# Altium PCB SatelliteDevBoard.PcbDoc
Units mil, origin at the board's own origin, x right, y up, seen from the top; angles counter-clockwise.
Board outline 4550 x 2700 mil, 2 copper layers (Top, Bottom); 16 components, 22 nets, 90 pads, 0 vias.
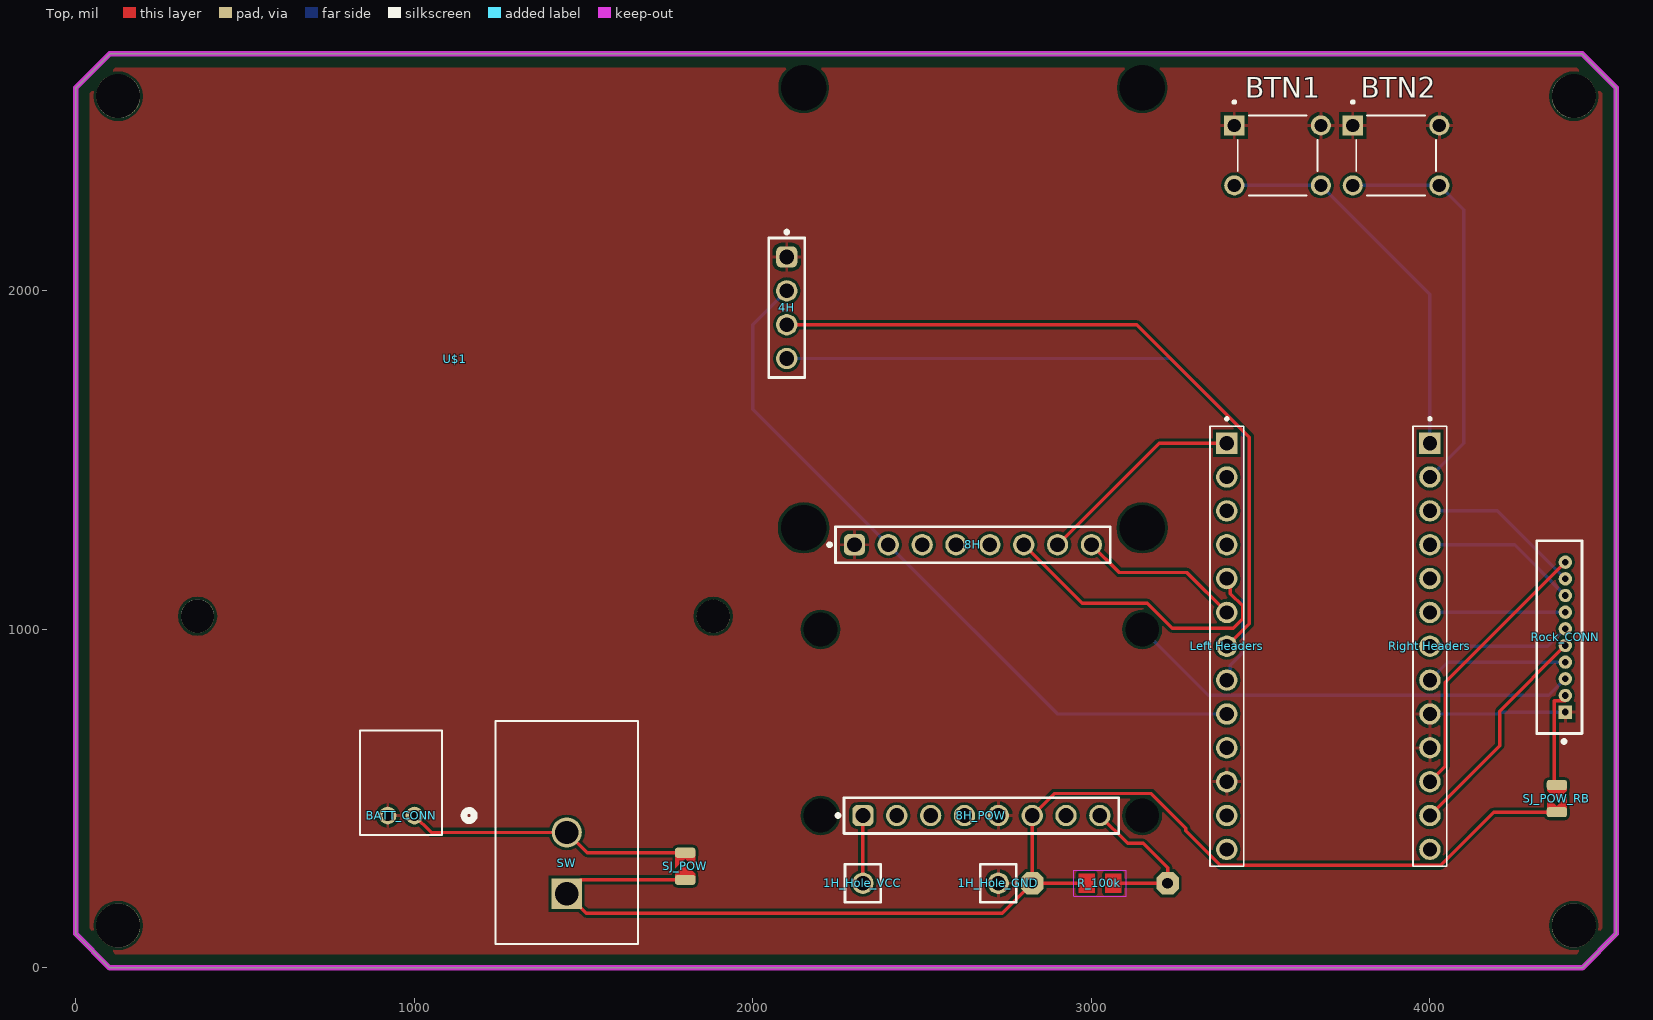
[diagram p0: Top view]
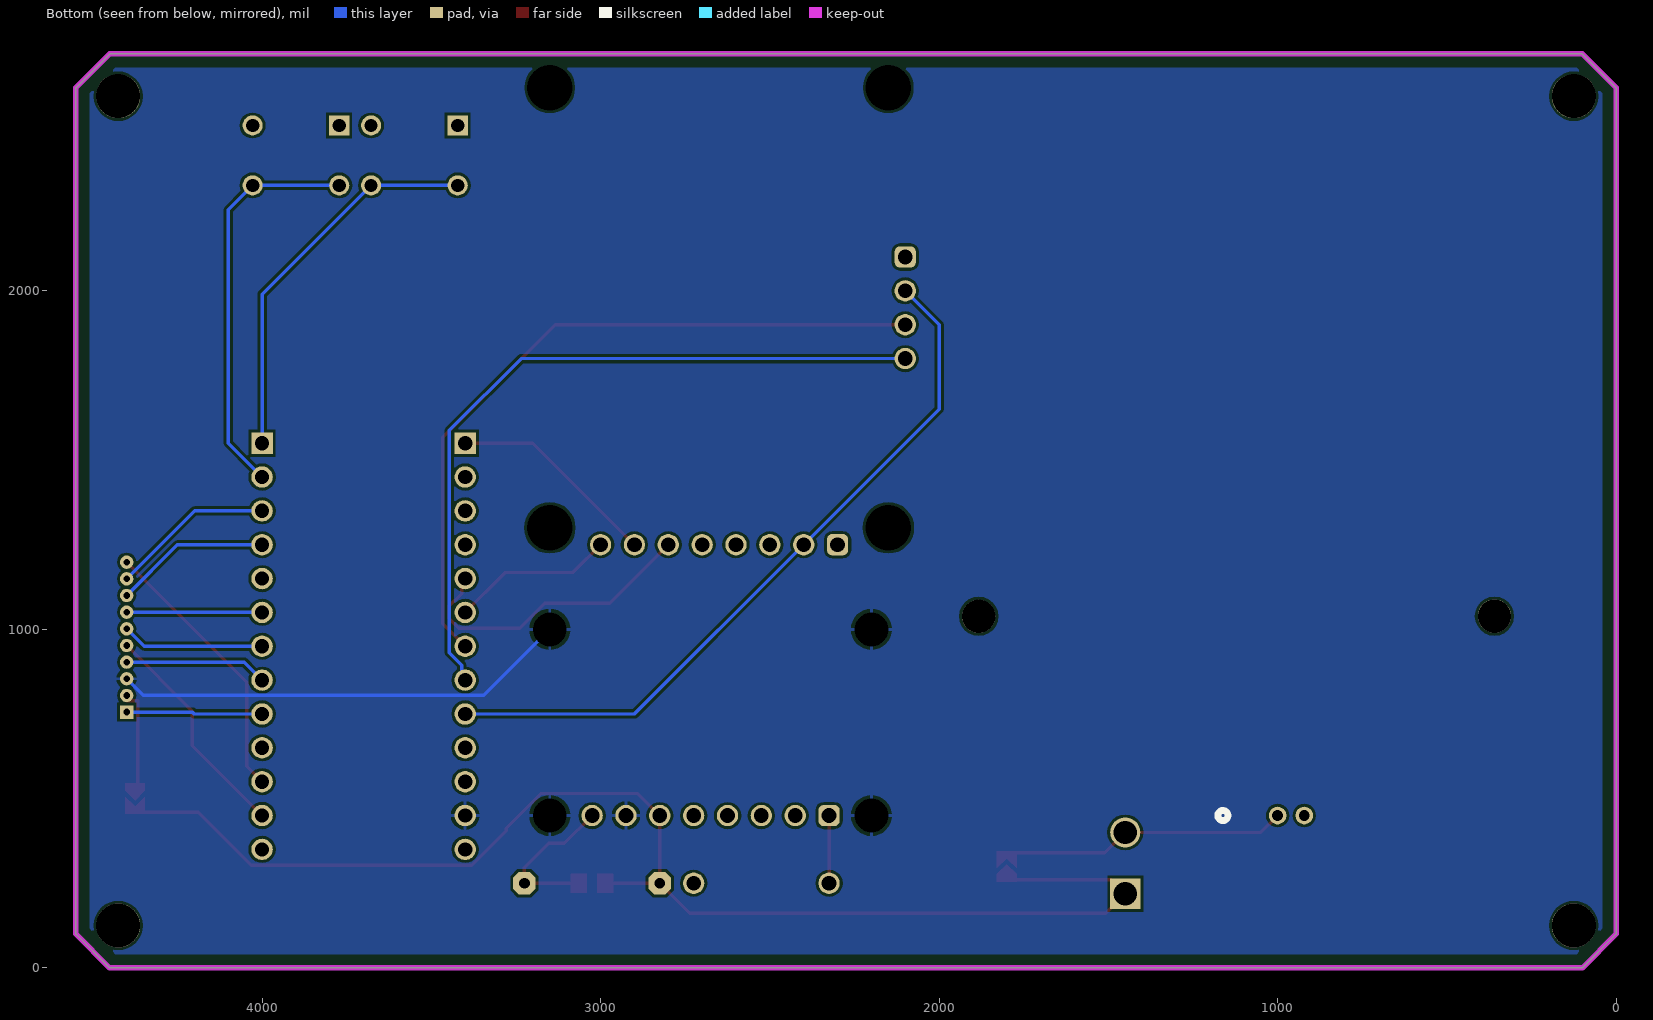
[diagram p1: Bottom view, seen from below]

## Layer stack, top to bottom
Top Solder: solder mask 0.4, Solder Resist, Dk 3.5
Top: signal copper 1.378
Dielectric 1: dielectric 12.6, FR-4, Dk 4.8
Bottom: signal copper 1.378
Bottom Solder: solder mask 0.4, Solder Resist, Dk 3.5

## Board outline
4550,2600 4450,2700 100,2700 0,2600 0,100 100,0 4450,0 4550,100

## Design rules (kind name [scope] priority, off if disabled: settings)
BoardOutlineClearance mdCopperDimension [All] p1: gap=10 ignorepadtopadclearanceinfootprint=FALSE except(0: Arc-SplitContinuation Track-SplitContinuation SMDPad-SplitContinuation THPad-SplitContinuation Via-SplitContinuation Fill-SplitContinuation Poly-SplitContinuation Region-SplitContinuation Text-SplitContinuation; 40: Poly-OutlineEdge Poly-CavityEdge Poly-CutoutEdge Poly-SplitBarrior)
Clearance "Clearance (Same Net)" [All] p1: gap=8 ignorepadtopadclearanceinfootprint=FALSE
Clearance [All] p2: gap=8 ignorepadtopadclearanceinfootprint=FALSE
Clearance Clearance_2 [(InNet('+3V3') OR InNet('+3V3') OR InNet('+3V3') OR InNet('+3V3'))] p3: gap=10 ignorepadtopadclearanceinfootprint=FALSE
Clearance Clearance_1 [All] p4: gap=10 ignorepadtopadclearanceinfootprint=FALSE
HoleSize [All] p1: absolutevalues=TRUE maxlimit=100000 minlimit=20 maxpercent=80.000 minpercent=20.000
HoleToHoleClearance mdDrill [All] p1: gap=8 allowstackedmicrovias=TRUE
MinimumSolderMaskSliver [All] p1 off: minsoldermaskwidth=10
PasteMaskExpansion mlMinCreamFrame [All] p1: expansion=0
PolygonConnect PolygonConnect_For_PolygonThermal_ON_Width160000_Gap100000 [InPolygonClass('PolygonThermal_ON_Width160000_Gap100000') vs Not IsVia] p1: connectstyle=Relief reliefconductorwidth=16 reliefentries=4 polygonreliefangle="90 Angle" airgapwidth=10
PolygonConnect ThermalVias [IsVia] p2: connectstyle=Direct reliefconductorwidth=10 reliefentries=4 polygonreliefangle="90 Angle" airgapwidth=10
PolygonConnect [All] p3: connectstyle=Relief reliefconductorwidth=10 reliefentries=4 polygonreliefangle="90 Angle" airgapwidth=10
RoutingVias [All] p1: holewidth=20 width=36 viastyle="Through Hole" minholewidth=20 minwidth=36 maxholewidth=100 maxwidth=100
SolderMaskExpansion mlMinStopFrame [All] p1: expansion=4 istentingtop=FALSE
SupplyNets "Schematic Supply Nets_2" [InNet('+3V3')] p1: voltage=0.000
SupplyNets "Schematic Supply Nets_1" [InNet('VCC')] p2: voltage=0.000
SupplyNets "Schematic Supply Nets" [InNet('GND')] p3: voltage=0.000
Width [All] p1: maxlimit=10 minlimit=10 preferedwidth=10
26 further rules are at their usual default settings.

## Components (designator, comment, footprint, x,y, rotation, side; value= is the part's Value field where it differs from the comment)
1H_Hole_GND "Solar_Hole" 61300111121 2725,250 r90 top
1H_Hole_VCC "Solar_Hole" 61300111121 2325,250 r90 top
4H "GNS_4Header" 61300411121 2100,1950 r270 top
8H "GNS_8Header" 61300811121 2650,1250 r0 top
8H_POW "Converter" 61300811121 2675,450 r0 top
BATT_CONN "Battery_Connector" CONN_S2B-PH-K-S_JST 1000,450 r180 top
BTN1 "ALERT_BTN" SW_TS02-66-43-BK-260-LCR-D 3550,2400 r0 top
BTN2 "SOS_BTN" SW_TS02-66-43-BK-260-LCR-D 3900,2400 r0 top
"Left Headers" "KB2040_Left_Header" HARWIN_M20-9991346 3400,950 r270 top
R_100k "" 0805-THM 3025,250 r180 top
"Right Headers" "KB2040_Right_Header" HARWIN_M20-9991346 4000,950 r270 top
Rock_CONN "53047-1010" FP-53047-1010-MFG 4382.28,976.97 r270 top
SJ_POW "Solder Jumper" SOLDERJUMPER_ARROW_NOPASTE 1800,300 r90 top
SJ_POW_RB "Solder Jumper for RockBLOCK" SOLDERJUMPER_ARROW_NOPASTE 4375,500 r270 top
SW "BATT_SW" SW2_GF-123-0054_CWI 1450,219 r180 top
U$1 "ROCKBLOCK-9603" ROCKBLOCK-9603 1121.26,1800 r90 top

## Footprints (in the part's own frame and the unit in brackets; to place one, negate y for a bottom-side part, rotate by r counter-clockwise, add the part's x,y. Pads: shape width x height; smd on the part's side, far side on the other; paste and mask are expansions set on the pad)
0805-THM [mil]
  oct 66x66 / inner round 60.98 / far side oct 66x66 hole 32: 1(-200,0) 2(200,0)
  Top region: 15.75,-27.56 15.75,27.56 62.99,27.56 62.99,-27.56
  Top region: -62.99,-27.56 -62.99,27.56 -15.75,27.56 -15.75,-27.56
  Top lines w10: 200.79,0 200,0 39.37,0 ; -43.31,0 -177.17,0
  Top keep-out lines w2: 77.68,38.7 77.68,-38.7 -77.68,-38.7 -77.68,38.7 77.68,38.7
61300111121 [mm] "Pin Header, pitch 2.54 mm, THT, Vertical, single row, 1p"
  round 1.6 hole 1.1: 1(0,0)
  silkscreen extent -1.42,-1.34 1.42,1.34, body extent -1.27,-1.27 1.27,1.27, height 8.57
61300411121 [mm] "Pin Header, pitch 2.54 mm, THT, Vertical, single row, 4p"
  rrect50% 1.6x1.6 hole 1.1: 1(-3.81,0)
  round 1.6 hole 1.1: 2(-1.27,0) 3(1.27,0) 4(3.81,0)
  silkscreen extent -5.8,-1.34 5.23,1.34, body extent -5.08,-1.27 5.08,1.27, height 8.57
61300811121 [mm] "Pin Header, pitch 2.54 mm, THT, Vertical, single row, 8p"
  rrect50% 1.6x1.6 hole 1.1: 1(-8.89,0)
  round 1.6 hole 1.1: 2(-6.35,0) 3(-3.81,0) 4(-1.27,0) 5(1.27,0) 6(3.81,0) 7(6.35,0) 8(8.89,0)
  silkscreen extent -10.88,-1.34 10.31,1.34, body extent -10.16,-1.27 10.16,1.27, height 8.57
CONN_S2B-PH-K-S_JST [mil]
  round 52 / inner round 60 / far side round 52 hole 32 paste-99999 mask+0: 1(0,0) 2(78.74,0)
  silkscreen extent -177,-251 160,58
FP-53047-1010-MFG [mm]
  rect 1x1 hole 0.508 paste-2539.97 mask+0: 1(5.625,0.45)
  round 1 hole 0.508 paste-2539.97 mask+0: 2(4.375,0.45) 3(3.125,0.45) 4(1.875,0.45) 5(0.625,0.45) 6(-0.625,0.45) 7(-1.875,0.45) 8(-3.125,0.45) 9(-4.375,0.45) 10(-5.625,0.45)
  silkscreen extent -7.23,-1.7 7.95,1.7, body extent -7.32,-1.8 7.32,1.8, height 0.25
HARWIN_M20-9991346 [mm]
  rect 1.605x1.605 / inner round 1.605 / far side rect 1.605x1.605 hole 1.07: 1(-15.24,0)
  round 1.605 hole 1.07: 2(-12.7,0) 3(-10.16,0) 4(-7.62,0) 5(-5.08,0) 6(-2.54,0) 7(0,0) 8(2.54,0) 9(5.08,0) 10(7.62,0) 11(10.16,0) 12(12.7,0) 13(15.24,0)
  silkscreen extent -17.17,-1.27 16.51,1.27
ROCKBLOCK-9603 [mil] "ROCKBLOCK-9603"
SOLDERJUMPER_ARROW_NOPASTE [mil]
  rrect50% 30x60 smd paste+0 mask+0: 1(-40,0) 2(40,0)
  Top region: -45,29 -22.5,29 6.5,0 -22.5,-29 -45,-29 -45,29
  Top region: -5,29 23,0 -5,-29 45,-29 45,29 -5,29
SW2_GF-123-0054_CWI [mil]
  rect 89x89 / inner round 60 / far side rect 89x89 hole 69 paste-99999 mask+0: 1(0,0)
  round 89 / inner round 60 / far side round 89 hole 69 paste-99999 mask+0: 2(0,-181)
  silkscreen extent -210,-510 210,148
SW_TS02-66-43-BK-260-LCR-D [mm]
  rect 1.508x1.508 / inner round 1.508 / far side rect 1.508x1.508 hole 1: 1(-3.25,2.25)
  round 1.508 hole 1: 2(3.25,2.25) 3(-3.25,-2.25) 4(3.25,-2.25)
  silkscreen extent -3.35,-3 3,4.1, body extent -3.95,-3 3.95,3, height 4.3

## Part data
1H_Hole_GND 1H_Hole_VCC: library part CMP-1502-01058-4, "THT Vertical Pin Header WR-PHD, Pitch 2.54 mm, Single Row, 1 pins", Color=Black, Contact Resistance=20mΩ, Current Rating=3A, Operating Supply Voltage=250V, Connector Type="Male Pin", Contact Material=Copper, Contact Mating Length=5.9944mm, Contact Plating=Gold, Gender=Male, Lead Pitch=2.54mm, Mount="Through Hole", Number of Contacts=1, Number of Pins=1, Number of Positions=1, Number of Rows=1, Orientation=Vertical, Packaging=Bulk, RoHS=Compliant, Termination=Solder
4H: library part CMP-1502-01064-4, "THT Vertical Pin Header WR-PHD, Pitch 2.54 mm, Single Row, 4 pins", Color=Black, Contact Resistance=20mΩ, Current Rating=3A, Max Operating Temperature=105°C, Min Operating Temperature=-40°C, Operating Supply Voltage=250V, Connector Type="Male Pin", Contact Material=Gold, Contact Mating Length=5.9944mm, Contact Plating=Gold, Gender=Male, Height=8.89mm, Lead Free="Lead Free", Lead Pitch=2.54mm, Mount="Through Hole", Number of Contacts=4, Number of Pins=4, Number of Positions=4, Number of Rows=1, Orientation=Vertical, Packaging=Bulk, Pitch=2.54mm, RoHS=Compliant, Termination=Solder, Voltage Rating=250V
8H 8H_POW: library part CMP-1502-01076-4, "THT Vertical Pin Header WR-PHD, Pitch 2.54 mm, Single Row, 8 pins", Color=Black, Contact Resistance=20mΩ, Current Rating=3A, Max Operating Temperature=105°C, Min Operating Temperature=-40°C, Operating Supply Voltage=250V, Connector Type="Male Pin", Contact Material=Gold, Contact Mating Length=5.9944mm, Contact Plating=Gold, Gender=Male, Height=8.54mm, Lead Pitch=2.54mm, Mount="Through Hole", Number of Contacts=8, Number of Pins=8, Number of Positions=8, Number of Rows=1, Orientation=Vertical, Packaging=Bulk, Pitch=2.54mm, RoHS=Compliant, Termination=Solder, Voltage Rating=250V
BATT_CONN: library part S2B-PH-K-SLFSN, "CONNECTOR; MALE; THROUGH HOLE; 2.0MM PITCH; DISCONNECTABLE CRIMP STYLE CONNECTOR; SIDE ENTRY TYPE; RIGHT ANGLE; 2PINS", Manufacturer_Name=JST, Manufacturer_Part_Number=S2B-PH-K-S(LF)(SN), Copyright="Copyright (C) 2025 Ultra Librarian. All rights reserved.", RefDes=RefDes, Type=Type
BTN1 BTN2: library part TS02-66-43-BK-260-LCR-D, "6 x 6 mm, 4.3 mm Actuator Height, 260 gf, Black, Long Crimped, Through Hole, SPST, Tactile Switch", Package=None, Check_prices=https://www.snapeda.com/parts/TS02-66-43-BK-260-LCR-D/Same+Sky/view-part/?ref=eda, MF="Same Sky", MP=TS02-66-43-BK-260-LCR-D, SnapEDA_Link=https://www.snapeda.com/parts/TS02-66-43-BK-260-LCR-D/Same+Sky/view-part/?ref=snap
"Left Headers" "Right Headers": library part M20-9991346, Package=None, Availability=Unavailable, MP=M20-9991346, Price=None
R_100k: library part RESISTOR_DUAL, Package=0805-THM, DeviceSetName=RESISTOR_DUAL, GateName_1=G$1, LibraryName=microbuilder, SymbolName_1=R-US
Rock_CONN: library part CMP-04776-000170-1, "CONN HEADER VERT 10POS 1.25MM", Color=Natural, Contact Resistance=20MR, Current=1A, Flammability Rating="UL94 V-0", Housing Color=White, Insulation Resistance=100MR, Max Operating Temperature=85°C, Max Voltage Rating (AC)=125V, Max Voltage Rating (DC)=125.125kV, Min Operating Temperature=-40°C, Package Quantity=2000, Body Plating=Tin, Contact Gender=Male, Contact Material=Bronze, Contact Plating=Tin, Current Rating=1A, Depth=3.2mm, Glow Wire Compliant=Non-compliant, Height=4.2mm, Housing Material=Nylon, Lead Free="Lead Free", Lead Pitch=1.25mm, Length=14.25mm, Max Current Rating=1A, Mount="Through Hole", Number of Circuits=10, Number of Contacts=10, Number of Poles=10, Number of Positions=10, Number of Rows=1, Orientation=Vertical, Packaging=Tray, Pitch=1.25mm, Plating=Tin, Radiation Hardening=No, RoHS Compliant=Yes, Series=PicoBlade, Termination=Solder, Voltage=125V, Voltage Rating=125V, Voltage Rating (AC)=125V, Voltage Rating (DC)=125V, Working Voltage=125V
SJ_POW SJ_POW_RB: library part SOLDERJUMPER, Package=SOLDERJUMPER_ARROW_NOPASTE, BOM=EXCLUDE, DeviceSetName=SOLDERJUMPER, GateName_1=1, LibraryName=microbuilder, SymbolName_1=SOLDERJUMPER
SW: library part GF-123-0054, "Description", Manufacturer_Name="CW Industries", Copyright="Copyright (C) 2025 Ultra Librarian. All rights reserved.", Manufacturer_Part_Number=GF-123-0054
U$1: DeviceSetName=ROCKBLOCK-9603, GateName_1=G$1, LibraryName=nootropicdesign, SymbolName_1=SATMODEM

## Free pads (board coordinates)
  round 60 hole 135: 5(2150,2600) 6(3150,2600) 7(3150,1300) 8(2150,1300)
  round 60 hole 100: 9(2200,1000) 10(3150,1000) 11(3150,450) 12(2200,450)
  round 98.43 hole 98.43 unplated: MH1(359.4,1039) MH2(1883,1038.5)
  round 130 hole 130 unplated: MH3(125,125) MH4(4425,125) MH5(125,2575) MH6(4425,2575)

## Nets (pads, with @x,y where several pads share a name; then routed paths per layer and width w, separated by ;. In a path a pad name is that pad's centre, name@x,y a point inside that pad or via, vN(x,y) a via of type N, cw(c..) or ccw(c..) an arc to the next point about the centre after c; other vN are vias at no path point)
+3V3: 4H.2 8H.2 "Left Headers.9" | length 2164.2
  Bottom w10: 4H.2 2000,1900 2000,1650 8H.2 2900,750 3400,750
GND: 1H_Hole_GND.1 4H.1 8H.1 8H_POW.5 "Left Headers.11" "Right Headers.9" "Right Headers.10" BATT_CONN.2 BTN1.1 BTN1.2 BTN2.1 BTN2.2 Rock_CONN.1 | length 402.3
  Bottom w10: 4000,750 4200,750 4205.51,755.51 Rock_CONN.1
Net1H_Hole_VCC_1: 1H_Hole_VCC.1 8H_POW.1 | length 200
  Top w10: 1H_Hole_VCC.1 8H_POW.1
Net4H_3: 4H.3 "Left Headers.7" | length 2149.6
  Top w10: 4H.3 3134.4,1900 3466.59,1567.81 3466.59,1016.59 3400,950
Net4H_4: 4H.4 "Left Headers.8" | length 2191.6
  Bottom w10: 4H.4 3234.4,1800 3446.59,1587.81 3446.59,930.7 3410.18,894.28 3410.18,860.18 3400,850
Net8H_6: 8H.6 "Left Headers.5" | length 898.6
  Top w10: 8H.6 2973.3,1076.7 3165.22,1076.7 3238.52,1003.41 3419.3,1003.41 3446.59,1030.7 3446.59,1069.3 3410.18,1105.72 3410.18,1139.82 3400,1150
Net8H_7: 8H.7 "Left Headers.1" | length 624.3
  Top w10: 8H.7 3200,1550 3400,1550
Net8H_8: 8H.8 "Left Headers.6" | length 482.8
  Top w10: 8H.8 3082,1168 3282,1168 3400,1050
Net8H_POW_6: 8H_POW.6 R_100k.2 SJ_POW.1 SJ_POW_RB.2 SW.1 | length 3736.5
  Top w10: SJ_POW.1 1491,260 SW.1 1507.5,161.5 2736.5,161.5 R_100k.2 8H_POW.6 2890,515 3176.92,515 3278.81,413.11 3278.81,405.29 3380.7,303.41 4031.41,303.41 4188,460 SJ_POW_RB.2
Net8H_POW_8: 8H_POW.8 R_100k.1 | length 332.6
  Top w10: 8H_POW.8 3107.07,367.93 3153.07,367.93 3225,296 R_100k.1 R_100k.1@3202.17,250
NetBATT_CONN_1: BATT_CONN.1 SJ_POW.2 SW.2 | length 845.6
  Top w10: BATT_CONN.1 1050,400 SW.2 1510,340 SJ_POW.2
NetBTN1_3: "Right Headers.1" BTN1.3 BTN1.4 | length 1150.7
  Bottom w10: BTN1.3 BTN1.4 4000,1989.37 4000,1550
NetBTN2_3: "Right Headers.2" BTN2.3 BTN2.4 | length 1188.6
  Bottom w10: BTN2.3 BTN2.4 4100,2239.37 4100,1550 4000,1450
"NetRight Headers_3": "Right Headers.3" Rock_CONN.9 | length 483.2
  Bottom w10: 4000,1350 4199.21,1350 Rock_CONN.9
"NetRight Headers_4": "Right Headers.4" Rock_CONN.8 | length 462.1
  Bottom w10: 4000,1250 4250,1250 Rock_CONN.8
"NetRight Headers_6": "Right Headers.6" Rock_CONN.7 | length 400.3
  Bottom w10: 4000,1050 4200,1050 4200.79,1050.79 Rock_CONN.7
"NetRight Headers_7": "Right Headers.7" Rock_CONN.6 | length 421.4
  Bottom w10: 4000,950 4348.43,950 Rock_CONN.6
"NetRight Headers_8": "Right Headers.8" Rock_CONN.4 | length 422
  Bottom w10: 4000,850 4053.15,903.15 Rock_CONN.4
"NetRight Headers_11": "Right Headers.11" Rock_CONN.10 | length 814.1
  Top w10: 4000,550 4045,595 4045,843.43 Rock_CONN.10
"NetRight Headers_12": "Right Headers.12" Rock_CONN.5 | length 668
  Top w10: 4000,450 4206,656 4206,758.36 Rock_CONN.5
NetRock_CONN_2: Rock_CONN.2 SJ_POW_RB.1 | length 305.7
  Top w10: SJ_POW_RB.1 4367,540 4367,789 4400,789 Rock_CONN.2
VCC: 8H_POW.7 "Left Headers.12" pad.9 pad.10 pad.11 pad.12 Rock_CONN.3 | length 1351
  Bottom w10: pad.10 3345,805 4351.06,805 Rock_CONN.3
pads on no net: 8H.3 8H.4 8H.5 8H_POW.2 8H_POW.3 8H_POW.4 "Left Headers.2" "Left Headers.3" "Left Headers.4" "Left Headers.10" "Left Headers.13" "Right Headers.5" "Right Headers.13"

## Polygon pours and split planes (outlines as drawn)
GND on Top "Polygon_1_Net_GND" (solid, remove dead copper, pour order 4): 17,121.69 121.69,17 4428.31,17 4533,121.69 4533,2578.31 4428.31,2683 121.69,2683 17,2578.31
VCC on Bottom "Polygon_1_Net_VCC" (solid, remove dead copper, pour order 5): 17,121.69 121.69,17 4428.31,17 4533,121.69 4533,2578.31 4428.31,2683 121.69,2683 17,2578.31

## Keep-outs
Keep-Out Layer:
  the board outline again, w16

## Other copper
Multi-Layer:
  pour cut-out: 359.4,989.78 ccw(c359.4,1039) 408.62,1039 ccw(c359.4,1039) 359.4,1088.21 ccw(c359.4,1039) 310.19,1039 ccw(c359.4,1039)
  pour cut-out: 1883,989.28 ccw(c1883,1038.5) 1932.21,1038.5 ccw(c1883,1038.5) 1883,1087.71 ccw(c1883,1038.5) 1833.79,1038.5 ccw(c1883,1038.5)
  pour cut-out: 4425,60 ccw(c4425,125) 4490,125 ccw(c4425,125) 4425,190 ccw(c4425,125) 4360,125 ccw(c4425,125)
  pour cut-out: 125,2510 ccw(c125,2575) 190,2575 ccw(c125,2575) 125,2640 ccw(c125,2575) 60,2575 ccw(c125,2575)
  pour cut-out: 4425,2510 ccw(c4425,2575) 4490,2575 ccw(c4425,2575) 4425,2640 ccw(c4425,2575) 4360,2575 ccw(c4425,2575)
  pour cut-out: 125,60 ccw(c125,125) 190,125 ccw(c125,125) 125,190 ccw(c125,125) 60,125 ccw(c125,125)

## Silkscreen, mask and mechanical layers (free items; w line width, h text height)
Dimension:
  the board outline again, w16
tDocu:
  lines w10: 250,900 2000,900 2000,2950 250,2950 250,900 ; 2550,2700 2750,2700 2750,2940 2550,2940 2550,2700
tPlace:
  lines w10: 1725,200 1875,200 1875,400 1725,400 1725,200 ; 2050,1200 2050,2700 3250,2700 3250,1200 2050,1200 ; 2100,350 3250,350 3250,1100 2100,1100 2100,350 ; 3348.77,299.42 4048.77,299.42 4048.77,1599.42 3348.77,1599.42 3348.77,299.42 ; 4300,400 4450,400 4450,600 4300,600 4300,400
  text "SOS" at 3450,2150 h60
  text "ALERT" at 3750,2150 h60
  text "GNS Breakout" at 2300,1950 h60
  text "MOL_CON" at 4250,1300 h30
  text "KB2040" at 3500,950 h60
  text "SW" at 1400,750 h60
  text "bq25185" at 2450,700 h60
  text "RB_BAT" at 4300,350 h30
  text "SW" at 1770,150 h30
  text "R_100k" at 2925,125 h40
bPlace:
  lines w10: 825,315.5 825,2284.5 3575,2284.5 3575,315.5 825,315.5 ; 920,315 920,2285 3480,2285 3480,315 920,315
  text "Battery" at 3400,1750 h60 r90
  text "Solar Cell" at 3700,1550 h60 r90

## Text inside footprints (layer, text, board x,y; h text height)
1H_Hole_GND: Top Designator "SOL_GND" at 2591.71,133.34 h40
1H_Hole_VCC: Top Designator "SOL_VCC" at 2191.71,133.34 h40
SW: Top 3D Body "*" at 1652.5,244 h50 r180
U$1: tDocu "height = 10.5mm" at 668.5,1662.2 h42.5 r90; tDocu "Iridium module" at 593.5,1662.2 h42.5 r90; tDocu "height = 10mm" at 609.45,1091.34 h42.5; tDocu "supercap" at 609.45,1016.34 h42.5; tDocu "molex conn" at 1706.89,1171.06 h42.5 r90; tDocu "height = 10mm" at 1810.24,1957.48 h42.5 r90; tDocu "supercap" at 1735.24,1957.48 h42.5 r90